# Altium PCB Controller.PcbDoc
Units mm, origin at the board's own origin, x right, y up, seen from the top; angles counter-clockwise.
Board outline 152.4 x 101.6 mm, 2 copper layers (Top Layer, Bottom Layer); 16 components, 21 nets, 94 pads, 0 vias.
Unrouted connection lines stored in the file: 1.
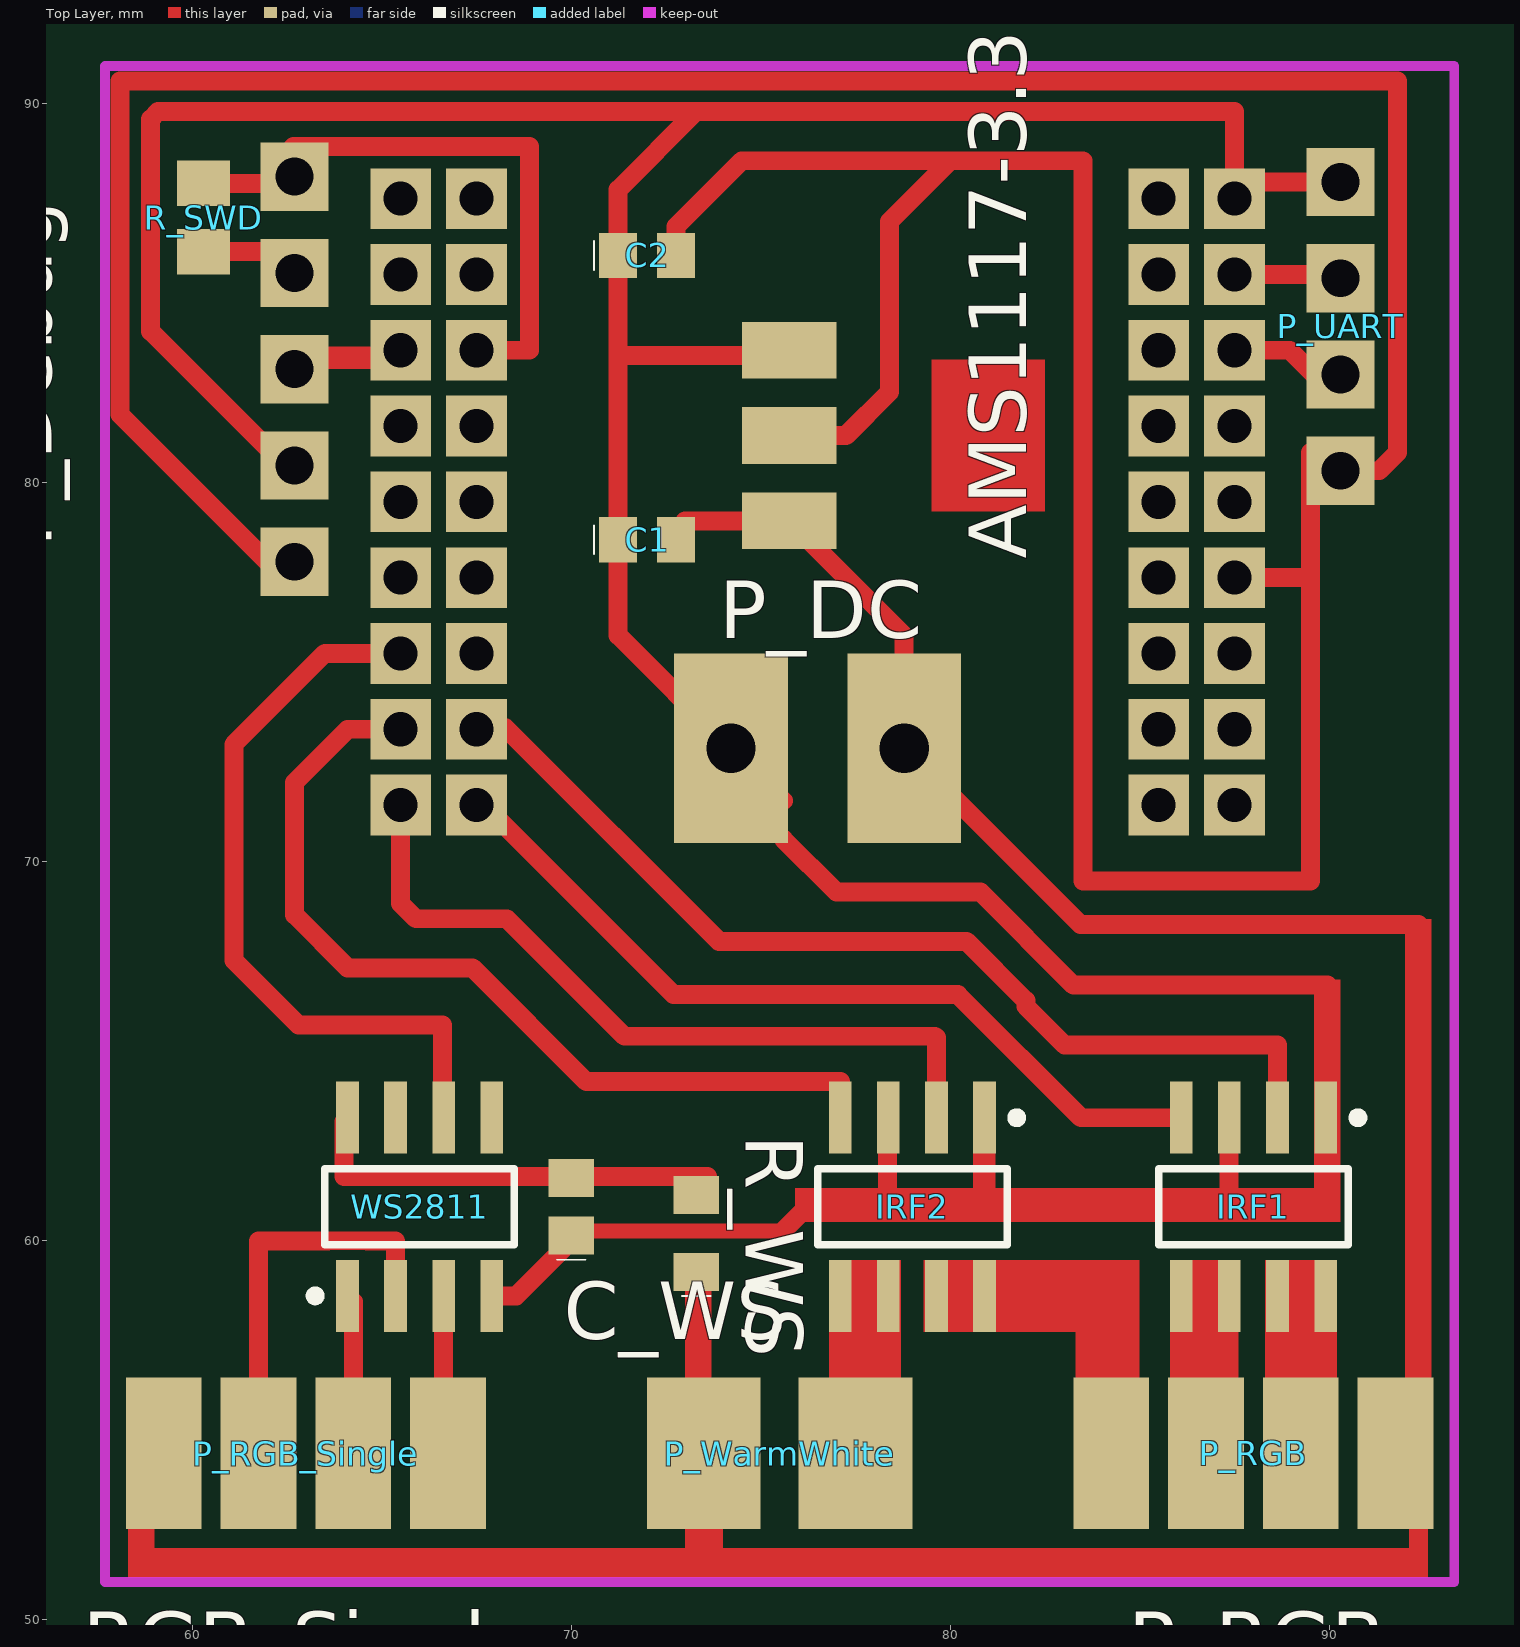
[diagram p0: Top Layer view]
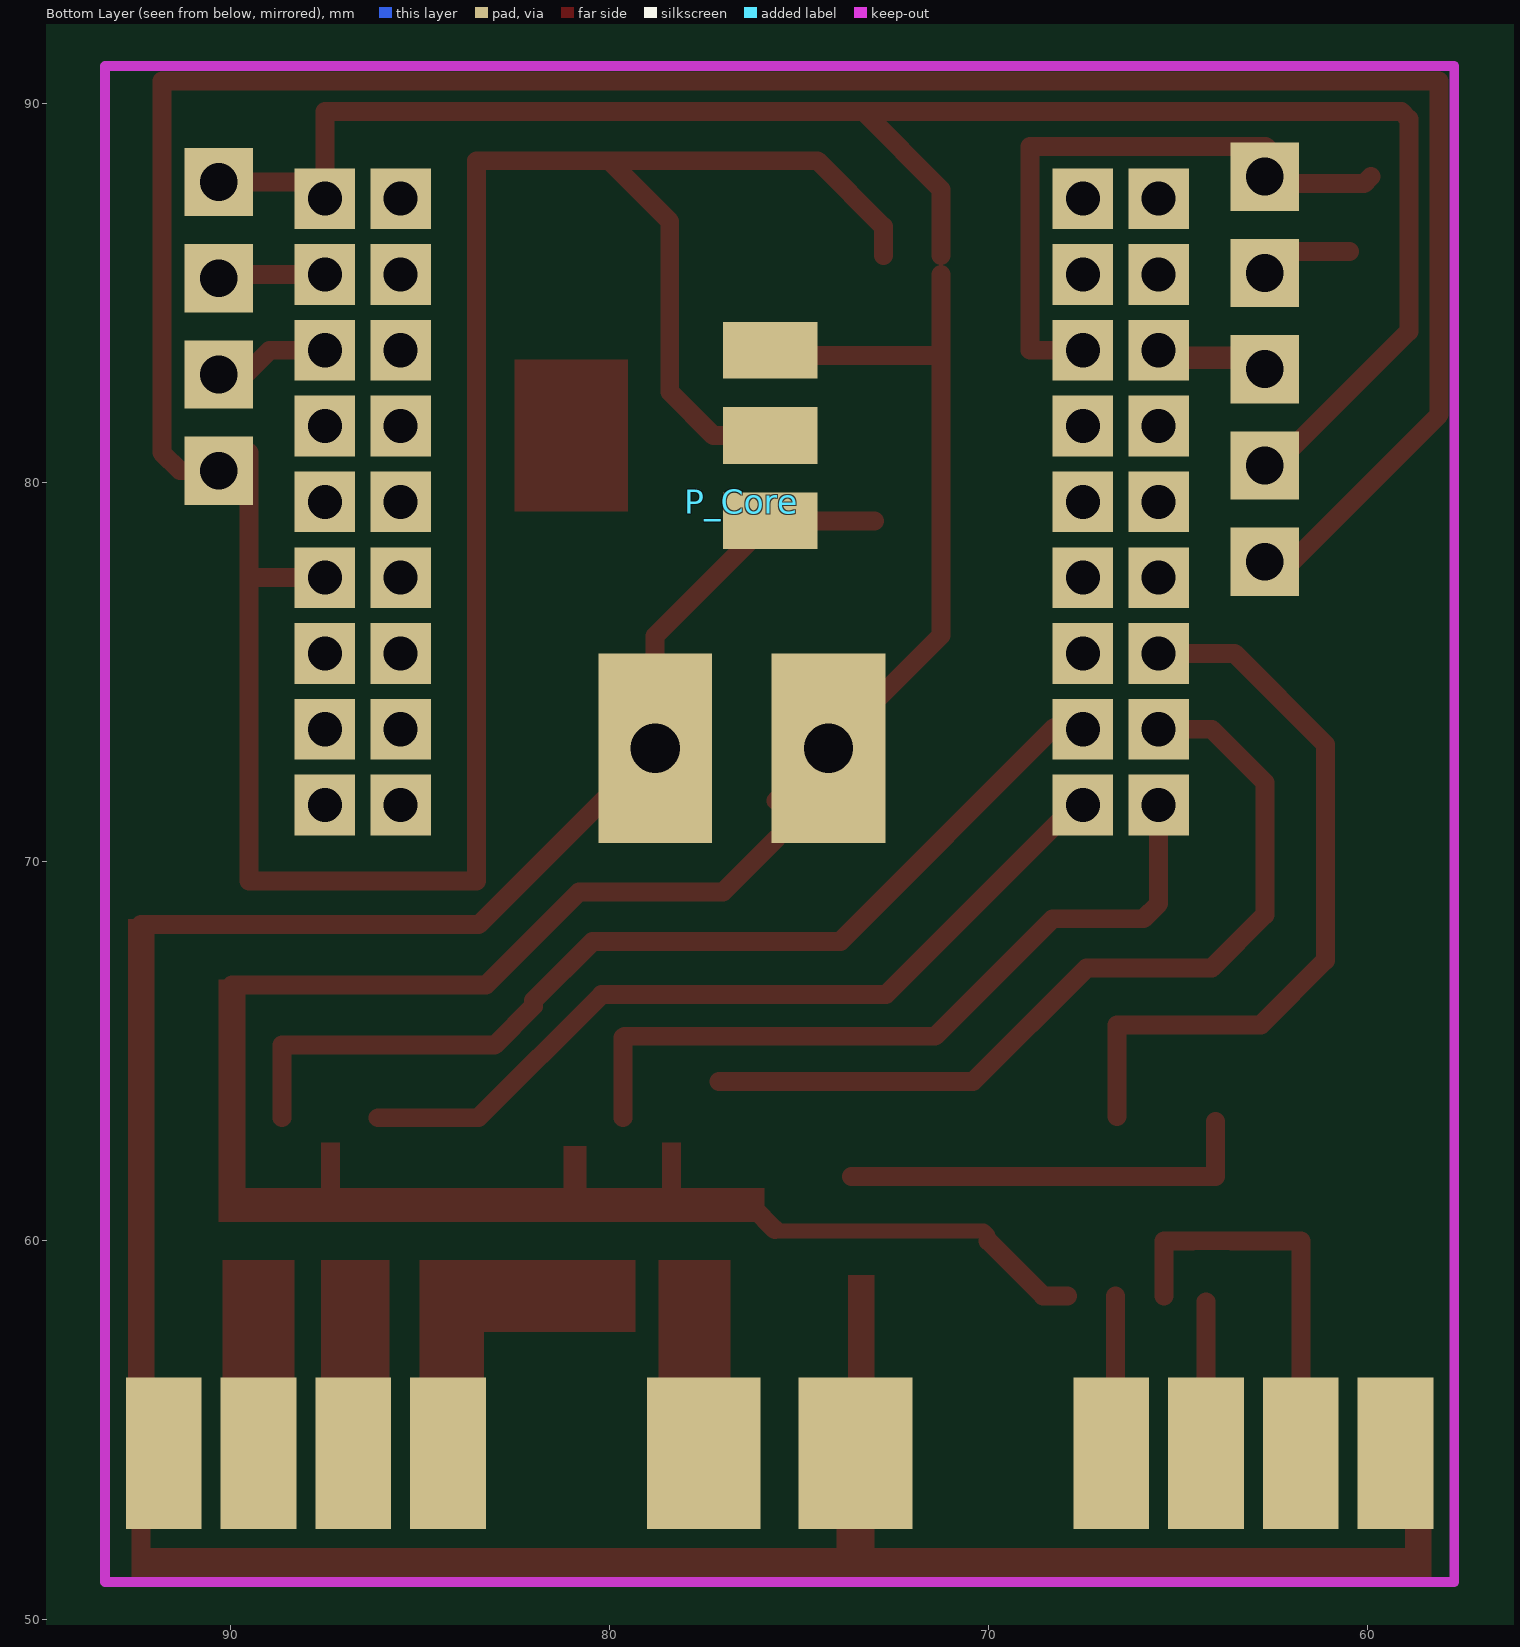
[diagram p1: Bottom Layer view, seen from below]
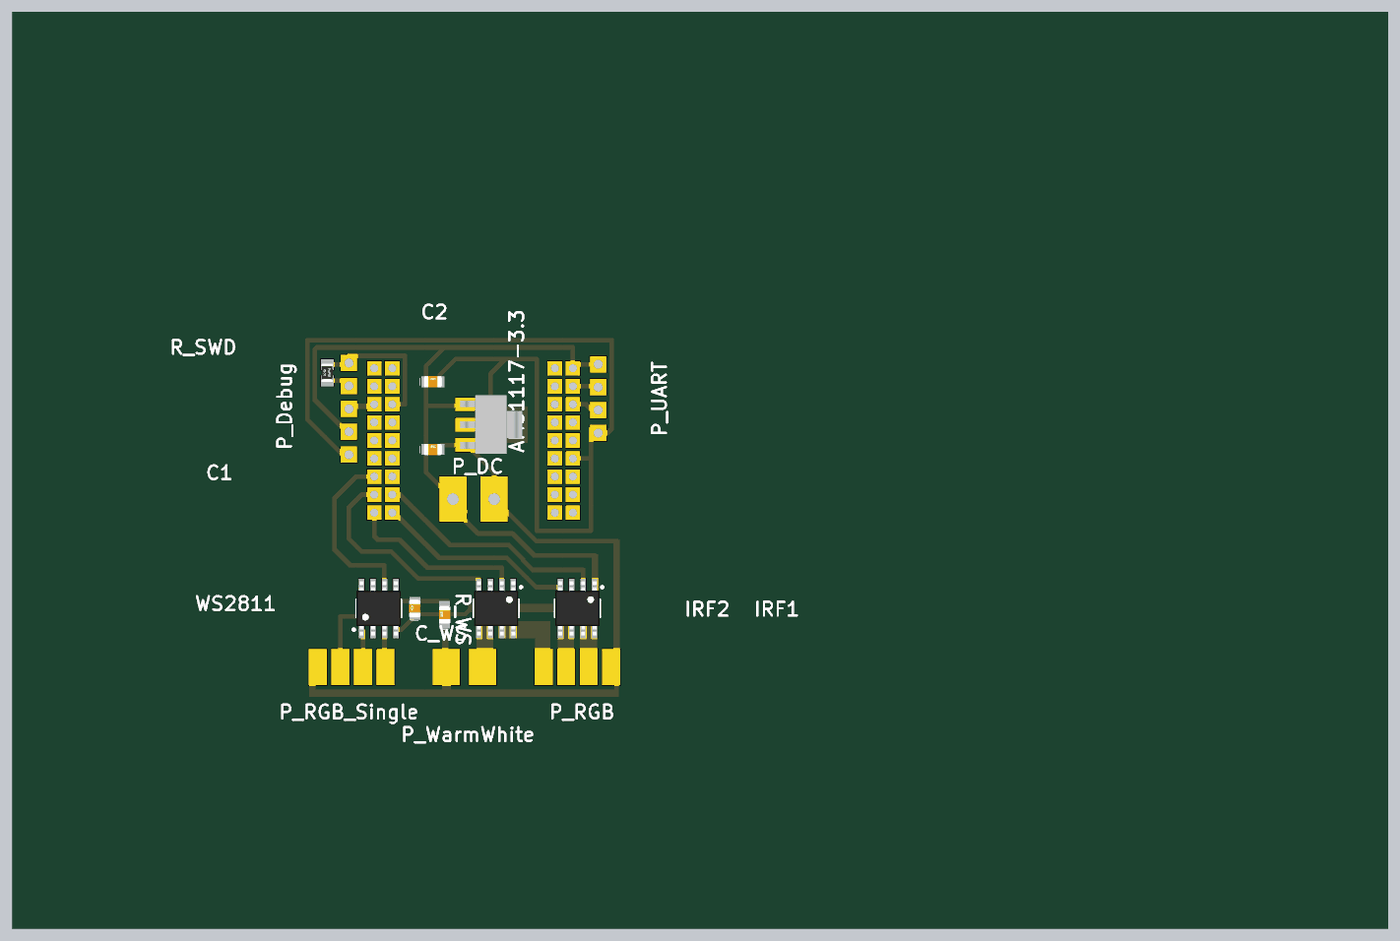
[diagram p2: 3D render of the assembled board from above, using the file's embedded part models]

## Layer stack, top to bottom
Top Solder: solder mask 0.0102, Solder Resist, Dk 3.5
Top Layer: signal copper 0.0356
Dielectric 1: dielectric 0.32, FR-4, Dk 4.8
Bottom Layer: signal copper 0.0356
Bottom Solder: solder mask 0.0102, Solder Resist, Dk 3.5

## Board outline
25.4,25.4 177.8,25.4 177.8,127 25.4,127

## Design rules (kind name [scope] priority, off if disabled: settings)
Clearance [All] p1: gap=0.254
PolygonConnect [All] p1: connectstyle=Relief reliefconductorwidth=0.254 reliefentries=4 polygonreliefangle="90 Angle" airgapwidth=0.254
RoomDefinition WS2811S [InComponentClass('WS2811S')] p1: confinementstyle=ConfineIn formatcopy=TRUE lockcomponents=FALSE outline 0,0 50.8,0 50.8,25.4 0,25.4
RoomDefinition Top [InComponentClass('Top')] p2: confinementstyle=ConfineIn formatcopy=TRUE lockcomponents=FALSE outline 0,0 50.8,0 50.8,25.4 0,25.4
RoomDefinition "SWD resistor hack" [InComponentClass('SWD resistor hack')] p3: confinementstyle=ConfineIn formatcopy=TRUE lockcomponents=FALSE outline 0,0 50.8,0 50.8,25.4 0,25.4
RoomDefinition LDO [InComponentClass('LDO')] p4: confinementstyle=ConfineIn formatcopy=TRUE lockcomponents=FALSE outline 0,0 50.8,0 50.8,25.4 0,25.4
RoomDefinition FETs [InComponentClass('FETs')] p5: confinementstyle=ConfineIn formatcopy=TRUE lockcomponents=FALSE outline 0,0 50.8,0 50.8,25.4 0,25.4
RoutingVias [All] p1: holewidth=0.711 width=1.27 viastyle="Through Hole" minholewidth=0.711 minwidth=1.27 maxholewidth=0.711 maxwidth=1.27
SolderMaskExpansion [All] p1: expansion=0.102
UnpouredPolygon [All] p1: allowunpoured=FALSE
Width [All] p1: maxlimit=0.254 minlimit=0.254 preferedwidth=0.254
29 further rules are at their usual default settings.

## Classes and differential pairs
component class WS2811S: C_WS P_RGB_Single R_WS WS2811
component class Top: P_Core P_DC P_Debug P_UART
component class "SWD resistor hack": R_SWD
component class LDO: AMS1117-3.3 C1 C2
component class FETs: IRF1 IRF2 P_RGB P_WarmWhite

## Components (designator, comment, footprint, x,y, rotation, side; value= is the part's Value field where it differs from the comment)
AMS1117-3.3 "T1" SOT-223 75,84.5 r270 top
C1 "22uF" 0805-C 72,78.5 r0 top
C2 "22uF" 0805-C 72,86 r0 top
C_WS "Capacitor" 0805-C 70,60.9 r90 top
IRF1 "IRF7301" SOIC-8 88,60.9 r270 top
IRF2 "IRF7301" SOIC-8 79,60.9 r270 top
P_Core "Core51822_2" Core51822 88.5,70.5 r180 bottom
P_DC "Power supply" "DC cable pad with holes" 76.5,73 r180 top
P_Debug "Header SWD 2" "Header 1x5 2.54mm" 62.7,83 r270 top
P_RGB "LED strip RGB" "LED strip RGB connector" 88,54.4 r180 top
P_RGB_Single "LED strip RGB" "LED strip RGB connector" 63,54.4 r0 top
P_UART "Header UART" "Header 1x4 2.54mm" 90.3,85.4 r90 top
P_WarmWhite "LED strip single color" "LED strip single color" 75.5,54.4 r0 top
R_SWD "220-470" 0805-R 60.3,87 r90 top
R_WS "Resistor" "0805-C wide" 73.3,60.2 r90 top
WS2811 "WS2811S" SOIC-8 66,60.9 r90 top

## Footprints (in the part's own frame and the unit in brackets; to place one, negate y for a bottom-side part, rotate by r counter-clockwise, add the part's x,y. Pads: shape width x height; smd on the part's side, far side on the other; paste and mask are expansions set on the pad)
0805-C [mm]
  rect 1x1.2 smd mask+0.01: 1(-0.762,0) 2(0.762,0)
  silkscreen extent -1.4,-0.38 -1.4,0.38, body extent -1,-0.62 1,0.63, height 0.78
"0805-C wide" [mm]
  rect 1x1.2 smd mask+0.01: 1(-1.016,0) 2(1.016,0)
  silkscreen extent -1.65,-0.38 -1.65,0.38, body extent -1,-0.62 1,0.63, height 0.78
0805-R [mm] "Resistor 0805 / 2012 (2.0 x 1.2 mm)"
  rect 1.2x1.4 smd: 1(-0.9,0) 2(0.9,0)
  body extent -1,-0.62 1,0.62, height 0.45
Core51822 [mm]
  rect 1.6x1.6 hole 0.9: 1(1,17) 2(3,17) 3(1,15) 4(3,15) 5(1,13) 6(3,13) 7(1,11) 8(3,11) 9(1,9) 10(3,9) 11(1,7) 12(3,7) 13(1,5) 14(3,5) 15(1,3) 16(3,3) 17(1,1) 18(3,1) 19(21,17) 20(23,17) 21(21,15) 22(23,15) 23(21,13) 24(23,13) 25(21,11) 26(23,11) 27(21,9) 28(23,9) 29(21,7) 30(23,7) 31(21,5) 32(23,5) 33(21,3) 34(23,3) 35(21,1) 36(23,1)
"DC cable pad with holes" [mm]
  rect 3x5 hole 1.3: 1(-2.286,0) 2(2.286,0)
"Header 1x4 2.54mm" [mm]
  rect 1.8x1.8 hole 1: 1(-5.08,0) 2(-2.54,0) 3(0,0) 4(2.54,0)
"Header 1x5 2.54mm" [mm]
  rect 1.8x1.8 hole 1: 1(-5.08,0) 2(-2.54,0) 3(0,0) 4(2.54,0) 5(5.08,0)
"LED strip RGB connector" [mm]
  rect 2x4 all layers, no hole: 1(-3.75,0) 2(-1.25,0) 3(1.25,0) 4(3.75,0)
"LED strip single color" [mm]
  rect 3x4 all layers, no hole: 1(-2,0) 2(2,0)
SOIC-8 [mm] "SOIC, 8-Leads, Body 4.9x3.9mm, Pitch 1.27mm, IPC High Density"
  rect 1.9x0.6 smd: 1(-2.35,1.905) 2(-2.35,0.635) 3(-2.35,-0.635) 4(-2.35,-1.905) 5(2.35,-1.905) 6(2.35,-0.635) 7(2.35,0.635) 8(2.35,1.905)
  silkscreen extent -2.47,-2.5 1,2.88, body extent -3,-2.45 3,2.45, height 1.75
SOT-223 [mm]
  rect 1.5x2.5 all layers, no hole: 1(1,0.75) 2(3.25,0.75) 3(5.5,0.75)
  Top Layer region: 1.25,4.5 5.25,4.5 5.25,7.5 1.25,7.5
  body extent 0,0 6.5,6.89, height 1.6

## Part data
AMS1117-3.3: library part AMS1117
C1 C2: library part Capacitor
R_SWD: library part Resistor
WS2811: "RGB LED Controller"

## Nets (pads, with @x,y where several pads share a name; then routed paths per layer and width w, separated by ;. In a path a pad name is that pad's centre, name@x,y a point inside that pad or via, vN(x,y) a via of type N, cw(c..) or ccw(c..) an arc to the next point about the centre after c; other vN are vias at no path point)
3.3V: AMS1117-3.3.2 C2.2 P_Core.11 P_Debug.5 P_UART.1 | length 119.9
  Top Layer w0.5: P_Debug.5@61.98,77.92 58.1,81.8 58.1,90.6 91.8,90.6 91.8,80.8 91.32,80.32 P_UART.1 ; C2.2 72.762,86.762 74.5,88.5 83.5,88.5 83.5,69.5 89.5,69.5 89.5,77.5 ; AMS1117-3.3.2 77.25,81.25 78.4,82.4 78.4,86 78.4,86.9 80,88.5 ; P_Core.11 89.5,77.5 ; P_UART.1@89.5,80.8 89.5,77.5
12V: AMS1117-3.3.3 C1.2 P_DC.1 P_RGB.1 P_RGB_Single.1 P_WarmWhite.1 R_WS.1 | length 25.5
  Top Layer w0.5: C1.2@73,79 AMS1117-3.3.3 78.786,75.964 P_DC.1 83.443,68.343 92.357,68.343
GND: AMS1117-3.3.1 C1.1 C2.1 C_WS.1 IRF1.1 IRF1.3 IRF2.1 IRF2.3 P_Core.1 P_Core.12 P_DC.2 P_Debug.4 P_UART.4 WS2811.4 | length 94.1
  Top Layer w0.4: C_WS.1 70.124,60.262 75.586,60.262
  Top Layer w0.5: P_Debug.4 62.44,80.46 58.9,84 58.9,89.6 59.1,89.8 73.3,89.8 ; WS2811.4 68.55,58.55 C_WS.1@70,60 ; 71.238,75.976 P_DC.2 P_DC.2@75.6,71.614 ; 71.238,76 C1.1 71.238,83.5 C2.1@71.238,85.5 ; C2.1 71.238,87.738 73.3,89.8 ; 71.3,83.362 75.612,83.362 AMS1117-3.3.1 ; P_DC.2@75.6,70.6 77,69.2 80.8,69.2 83.25,66.75 89.95,66.75 ; 75.624,60.3 76.2,60.876 ; P_Core.1 87.5,89.8 73.3,89.8 ; P_Core.1@87.94,87.94 P_UART.4
NetC_WS_2: C_WS.2 R_WS.2 WS2811.8 | length 11.1
  Top Layer w0.5: WS2811.8@64,63.155 64,61.7 R_WS.2@73.6,61.7
NetIRF1_2: IRF1.2 P_Core.33 | length 25.9
  Top Layer w0.5: P_Core.33@68.25,73.55 73.9,67.9 80.434,67.9 81.996,66.338 81.996,66.191 83.022,65.165 88.635,65.165 IRF1.2
NetIRF1_4: IRF1.4 P_Core.35 | length 22
  Top Layer w0.5: P_Core.35@67.6,71.6 72.7,66.5 80.2,66.5 83.45,63.25 IRF1.4
NetIRF1_5: IRF1.5 IRF1.6 P_RGB.3
NetIRF1_7: IRF1.7 IRF1.8 P_RGB.2
NetIRF2_2: IRF2.2 P_Core.36 | length 20.3
  Top Layer w0.5: P_Core.36 65.5,68.9 65.9,68.5 68.3,68.5 71.4,65.4 79.6,65.4 79.635,65.365 IRF2.2
NetIRF2_4: IRF2.4 P_Core.34 | length 23.1
  Top Layer w0.5: P_Core.34 64.1,73.5 62.7,72.1 62.7,68.6 64.1,67.2 67.4,67.2 70.4,64.2 77.1,64.2
NetIRF2_5: IRF2.5 IRF2.6 P_WarmWhite.2
NetIRF2_7: IRF2.7 IRF2.8 P_RGB.4
NetP_Core_23: P_Core.23 P_Debug.1 R_SWD.2 | length 16.8
  Top Layer w0.5: R_SWD.2@59.9,88.08 60.08,87.9 62.6,87.9 62.6,88.8 62.677,88.877 68.9,88.877 68.9,83.5 P_Core.23
NetP_Core_24: P_Core.24 P_Debug.3
NetP_Core_32: P_Core.32 WS2811.6 | length 19.7
  Top Layer w0.5: P_Core.32 63.5,75.5 61.1,73.1 61.1,67.4 62.8,65.7 66.6,65.7 WS2811.6@66.6,63.285
NetP_Debug_2: P_Debug.2 R_SWD.1 | length 2.1
  Top Layer w0.5: R_SWD.1@60.46,86.1 P_Debug.2@62.6,86.1
UART_RX: P_Core.5 P_UART.2 | length 3.1
  Top Layer w0.5: P_Core.5 88.96,83.5 89.6,82.86 P_UART.2
UART_TX: P_Core.3 P_UART.3 | length 2
  Top Layer w0.5: P_Core.3 P_UART.3@89.5,85.5
WEAKB: P_RGB_Single.4 WS2811.3 | length 4
  Top Layer w0.5: P_RGB_Single.4@66.635,54.515 WS2811.3
WEAKG: P_RGB_Single.2 WS2811.2 | length 10.7
  Top Layer w0.5: P_RGB_Single.2 61.75,60 63.582,60 63.586,60.004 64.604,60.004 64.608,60 65.365,60 WS2811.2
WEAKR: P_RGB_Single.3 WS2811.1 | length 4
  Top Layer w0.5: P_RGB_Single.3 WS2811.1@64.25,58.395
pads on no net: P_Core.2 P_Core.4 P_Core.6 P_Core.7 P_Core.8 P_Core.9 P_Core.10 P_Core.13 P_Core.14 P_Core.15 P_Core.16 P_Core.17 P_Core.18 P_Core.19 P_Core.20 P_Core.21 P_Core.22 P_Core.25 P_Core.26 P_Core.27 P_Core.28 P_Core.29 P_Core.30 P_Core.31 WS2811.5 WS2811.7

## Keep-outs
Keep-Out Layer:
  lines w0.254: 57.7,51 93.3,51 93.3,91 57.7,91 57.7,51

## Other copper
Top Layer:
  rectangle net GND: 78.1,61.2 78.6,62.6
  rectangle net GND: 80.6,61.3 81.2,62.5
  rectangle net GND: 87.1,61 87.6,62.6
  rectangle net 12V: 58.3,51.4 59,52.9
  rectangle net 12V: 73,51.4 74,52.6
  rectangle net 12V: 92.1,51.4 92.6,53
  rectangle net 12V: 58.3,51.1 92.6,51.9
  rectangle net 12V: 92,55.5 92.7,68.5
  rectangle net GND: 89.6,60.5 90.3,66.9
  rectangle net GND: 75.9,60.5 90.3,61.4
  rectangle net NetIRF1_7: 88.3,56 90.2,59.5
  rectangle net NetIRF1_5: 85.8,56 87.6,59.5
  rectangle net NetIRF2_7: 83.3,55.6 85,59.1
  rectangle net NetIRF2_7: 79.3,57.6 85,59.5
  rectangle net NetIRF2_5: 76.8,55.8 78.7,59.5
  rectangle net 12V: 73,55.8 73.7,59.1
  rectangle net NetP_Core_24: 63.2,83 65.3,83.6